# Altium PCB DigitalLabBoard_Jig.PcbDoc
Units mm, origin at the board's own origin, x right, y up, seen from the top; angles counter-clockwise.
Board outline 155 x 110 mm, 2 copper layers (Top Layer, Bottom Layer), stack 1.571 mm thick; 24 components, 0 nets, 115 pads, 0 vias.
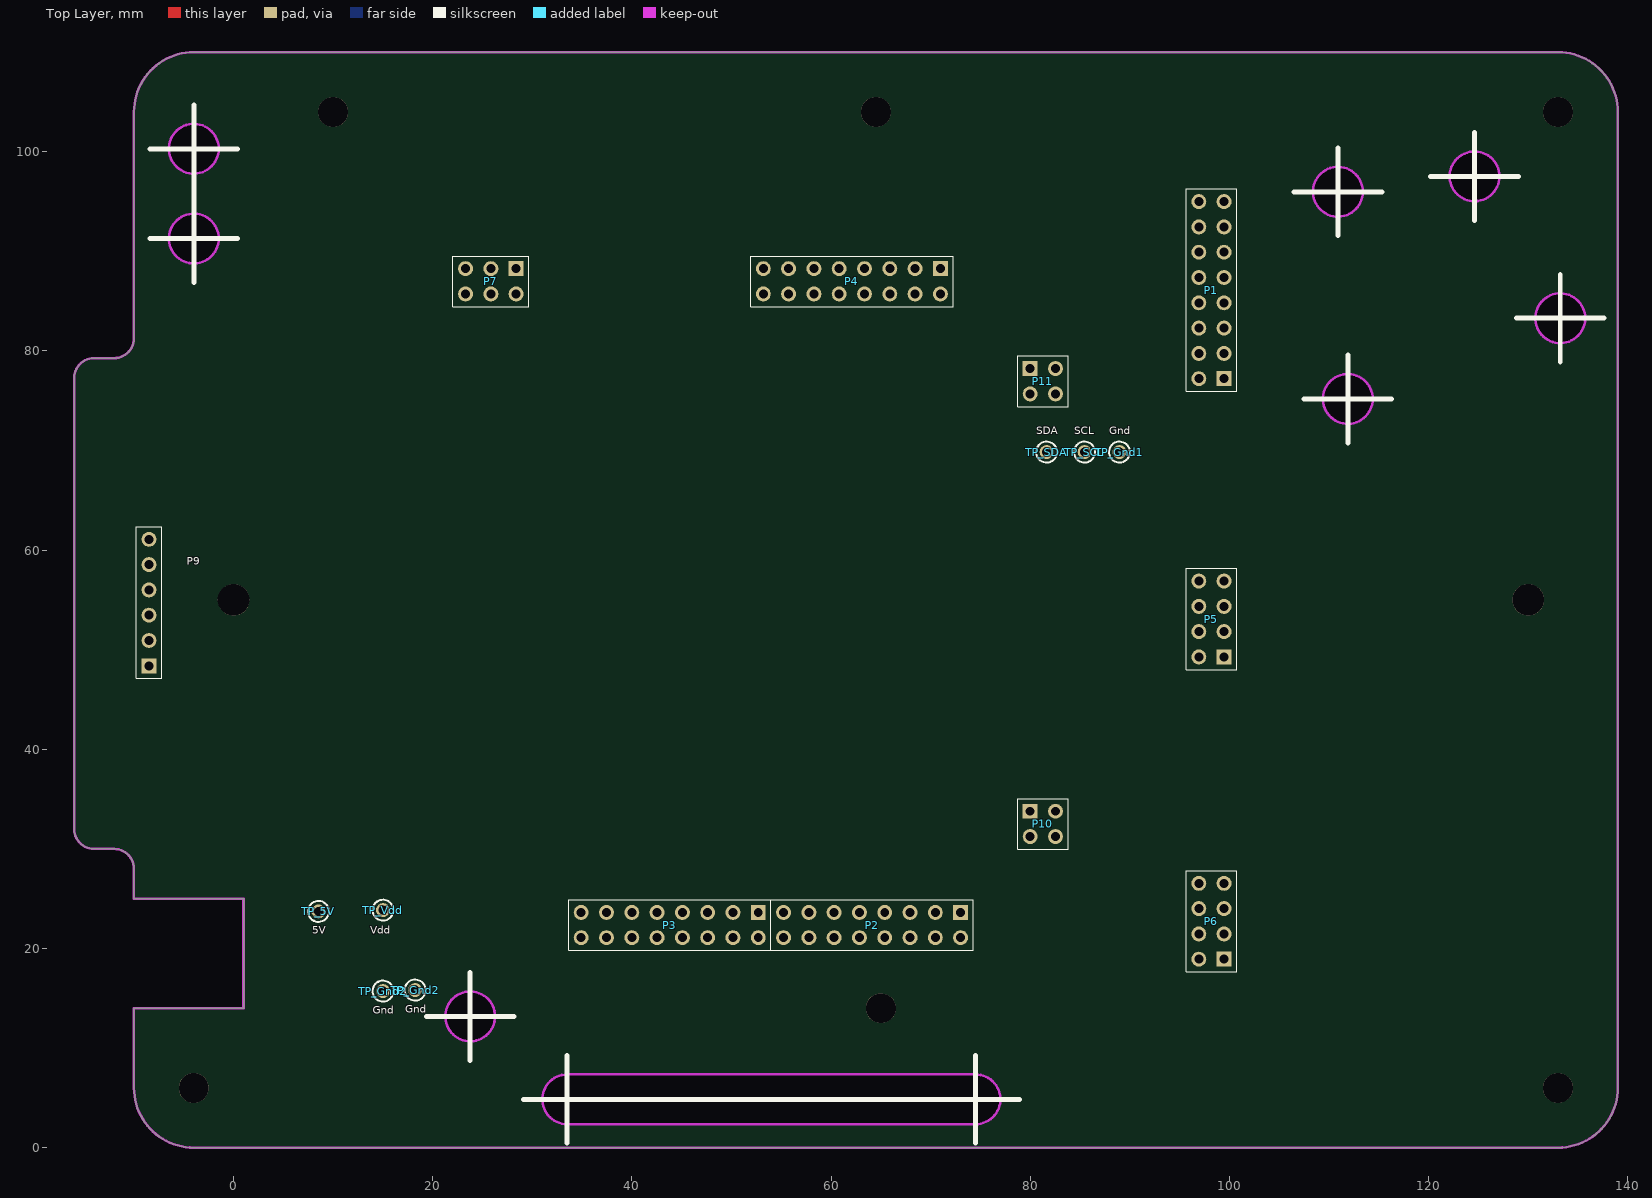
[diagram p0: Top Layer view]
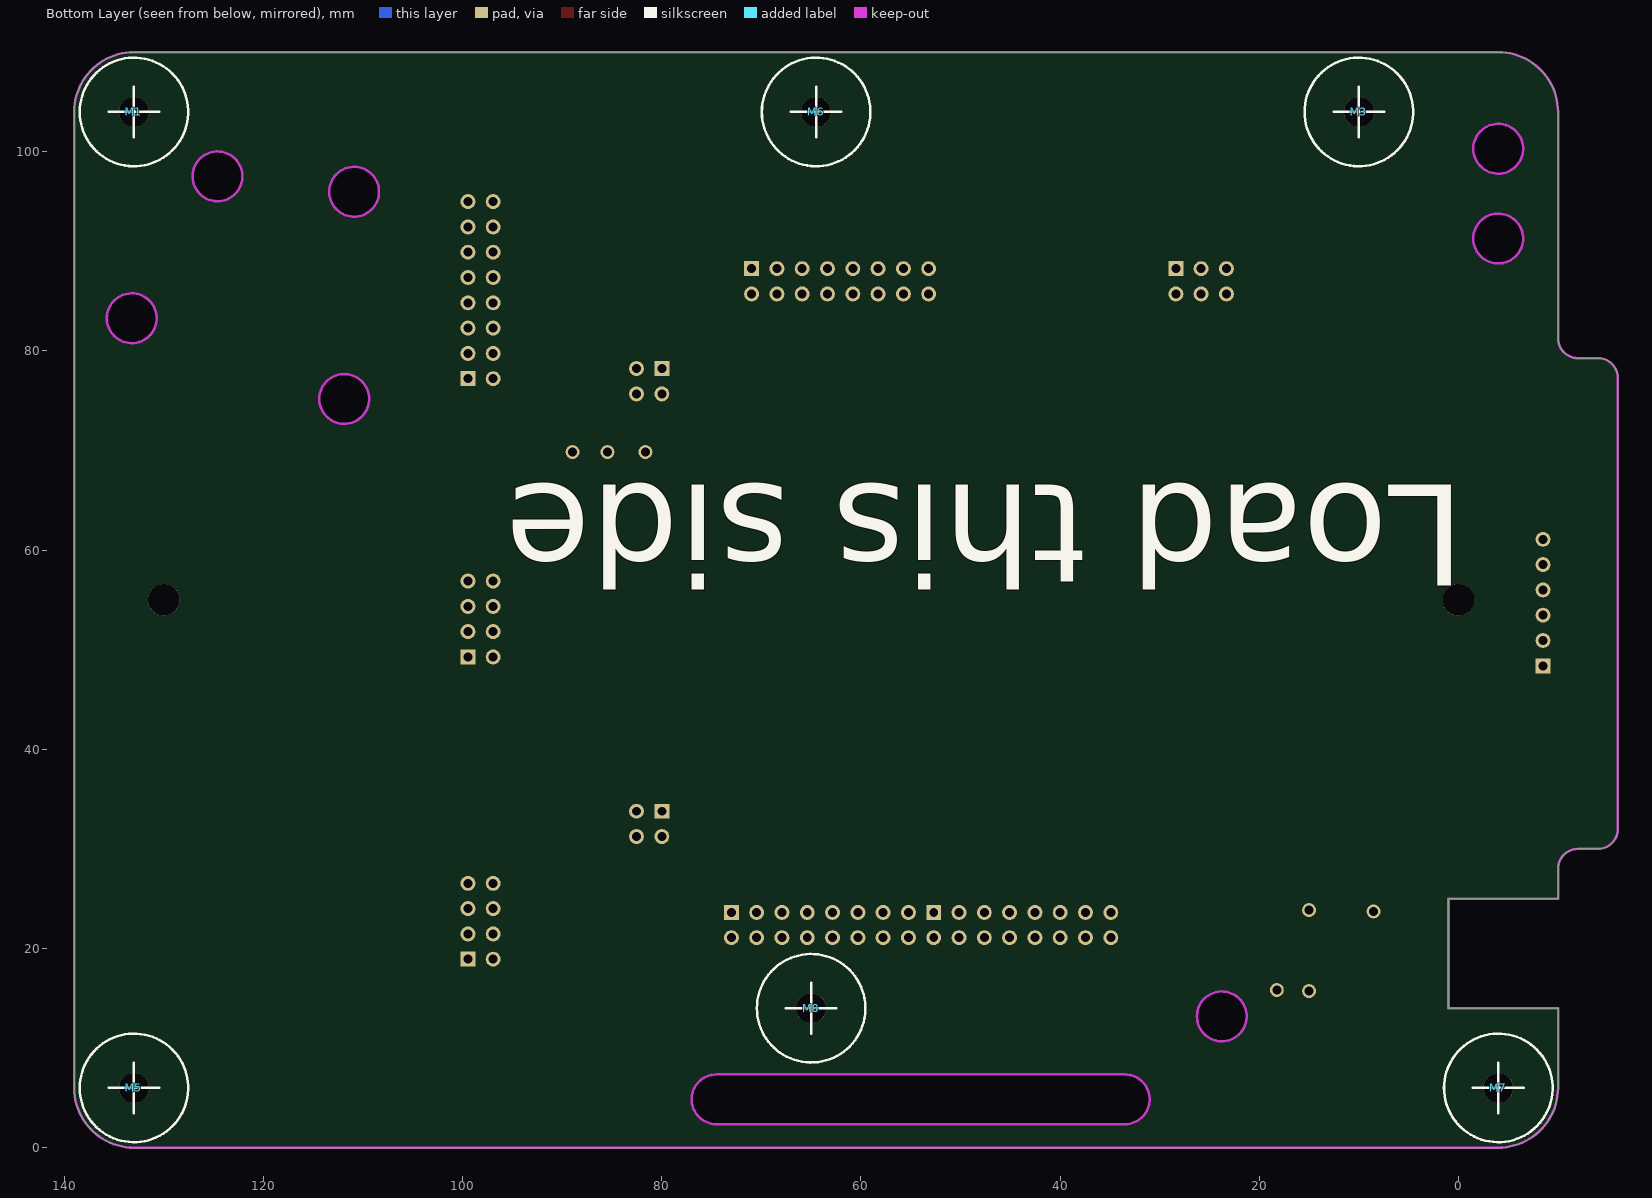
[diagram p1: Bottom Layer view, seen from below]

## Layer stack, top to bottom
Top Solder: solder mask 0.0102, Solder Resist, Dk 3.5
Top Layer: signal copper 0.0356
Dielectric 1: dielectric 1.5, FR-4, Dk 4.8
Bottom Layer: signal copper 0.0356
Bottom Solder: solder mask 0.0102, Solder Resist, Dk 3.5

## Board outline
-14,30 -12,30 cw(c-12,28) -10,28 -10,25 1,25 1,14 -10,14 -10,6 ccw(c-4,6) -4,0 133,0 ccw(c133,6) 139,6 139,104 ccw(c133,104) 133,110 -4,110 ccw(c-4,104) -10,104 -10,81.28 cw(c-12,81.28) -12,79.28 -14,79.28 ccw(c-14,77.28) -16,77.28 -16,32 ccw(c-14,32)
cut-out: 108.396,95.987 ccw(c110.896,95.987) 110.896,93.487 ccw(c110.896,95.987) 113.396,95.987 ccw(c110.896,95.987) 110.896,98.487 ccw(c110.896,95.987)
cut-out: 122.112,97.536 ccw(c124.612,97.536) 124.612,95.036 ccw(c124.612,97.536) 127.112,97.536 ccw(c124.612,97.536) 124.612,100.036 ccw(c124.612,97.536)
cut-out: 130.723,83.287 ccw(c133.223,83.287) 133.223,80.787 ccw(c133.223,83.287) 135.723,83.287 ccw(c133.223,83.287) 133.223,85.787 ccw(c133.223,83.287)
cut-out: 109.387,75.184 ccw(c111.887,75.184) 111.887,72.684 ccw(c111.887,75.184) 114.387,75.184 ccw(c111.887,75.184) 111.887,77.684 ccw(c111.887,75.184)
cut-out: 21.264,13.184 ccw(c23.764,13.184) 23.764,10.684 ccw(c23.764,13.184) 26.264,13.184 ccw(c23.764,13.184) 23.764,15.684 ccw(c23.764,13.184)
cut-out: 33.507,2.353 cw(c33.507,4.853) 33.507,7.353 74.502,7.353 cw(c74.502,4.853) 74.502,2.353
cut-out: -6.491,91.288 ccw(c-3.991,91.288) -3.991,88.788 ccw(c-3.991,91.288) -1.491,91.288 ccw(c-3.991,91.288) -3.991,93.788 ccw(c-3.991,91.288)
cut-out: -6.491,100.305 ccw(c-3.991,100.305) -3.991,97.805 ccw(c-3.991,100.305) -1.491,100.305 ccw(c-3.991,100.305) -3.991,102.805 ccw(c-3.991,100.305)

## Design rules (kind name [scope] priority, off if disabled: settings)
BoardOutlineClearance [All] p1: gap=0.381 ignorepadtopadclearanceinfootprint=FALSE
Clearance [All] p1: gap=0.127 ignorepadtopadclearanceinfootprint=FALSE
DiffPairsRouting [All] p1: maxlimit=0.127 minlimit=0.127 mostfreqgap=0.127 toplayer_minwidth=0.254 toplayer_maxwidth=0.254 toplayer_prefwidth=0.254 bottomlayer_minwidth=0.254 bottomlayer_maxwidth=0.254 bottomlayer_prefwidth=0.254 maxuncoupledlength=12.7
HoleSize [All] p1: absolutevalues=TRUE maxlimit=20 minlimit=0.25 maxpercent=80.000 minpercent=20.000
MinimumAnnularRing [All] p1: minimumring=0.089
MinimumSolderMaskSliver [All] p1 off: minsoldermaskwidth=0.254
PolygonConnect PolygonConnect_Via [IsVia] p1: connectstyle=Direct reliefconductorwidth=0.254 reliefentries=4 polygonreliefangle="90 Angle" airgapwidth=0.254
PolygonConnect [All] p2: connectstyle=Relief reliefconductorwidth=0.254 reliefentries=4 polygonreliefangle="90 Angle" airgapwidth=0.254
RoutingVias [All] p1: holewidth=0.711 width=1.27 viastyle="Through Hole" minholewidth=0.711 minwidth=1.27 maxholewidth=0.711 maxwidth=1.27
SilkToSilkClearance [All] p1 off: silktosilkclearance=0.254
SilkToSolderMaskClearance [IsPad] p1 off: minsilkscreentomaskgap=0.254 clearancetoexposedcopper=TRUE
SolderMaskExpansion [All] p1: expansion=0.102
Width [All] p1: maxlimit=0.762 minlimit=0.254 preferedwidth=0.254
25 further rules are at their usual default settings.

## Classes and differential pairs
differential pair USBD_R: +"" -""
differential pair USBD: +"" -""

## Components (designator, comment, footprint, x,y, rotation, side; value= is the part's Value field where it differs from the comment)
Logo "OSHW Logo" OSHW 185.293,55.499 r180 bottom
M1 "Plastic Bumper" "Bumper_RBS-2 + 3mm hole" 133,104 r180 bottom locked
M3 "Plastic Bumper" "Bumper_RBS-2 + 3mm hole" 10,104 r180 bottom locked
M5 "Plastic Bumper" "Bumper_RBS-2 + 3mm hole" 133,5.999 r180 bottom locked
M6 "Plastic Bumper" "Bumper_RBS-2 + 3mm hole" 64.5,104 r180 bottom locked
M7 "Plastic Bumper" "Bumper_RBS-2 + 3mm hole" -4,5.999 r180 bottom locked
M8 "Plastic Bumper" "Bumper_RBS-2 + 3mm hole" 65,13.999 r180 bottom locked (schematic designator M5)
P1 "Header 2x8" HDR2X8S 99.466,77.215 r90 top locked
P2 "Header 2x8" HDR2X8S 73.01,23.621 r180 top locked
P3 "Header 2x8" HDR2X8S 52.69,23.621 r180 top locked
P4 "Header 2x8" HDR2X8S 70.978,88.265 r180 top locked
P5 "Header 2x4" HDR2X4S 99.466,49.275 r90 top locked
P6 "Header 2x4" HDR2X4S 99.466,18.922 r90 top locked
P7 "Header 2x3" HDR2X3S 28.377,88.265 r180 top locked
P9 "Header, 6-Pin" HDR1X6S -8.492,48.386 r90 top locked
P10 "Header 2x2" HDR2X2S 79.995,33.781 r270 top locked
P11 "Header 2x2" HDR2X2S 79.995,78.231 r270 top locked
TP_5V "5V" "PCBPIN - 0.9MM" 8.526,23.723 r0 top locked
TP_Gnd1 "Gnd" "PCBPIN - 0.9MM" 88.959,69.85 r90 top locked
TP_Gnd2 "Gnd" "PCBPIN - 0.9mm" 18.237,15.824 r0 top
TP_Gnd2 "Gnd" "PCBPIN - 0.9MM" 15.003,15.722 r0 top locked
TP_SCL "SCL" "PCBPIN - 0.9MM" 85.456,69.85 r90 top locked
TP_SDA "SDA" "PCBPIN - 0.9MM" 81.646,69.85 r90 top locked
TP_Vdd "Vdd" "PCBPIN - 0.9MM" 15.003,23.85 r90 top locked

## Footprints (in the part's own frame and the unit in brackets; to place one, negate y for a bottom-side part, rotate by r counter-clockwise, add the part's x,y. Pads: shape width x height; smd on the part's side, far side on the other; paste and mask are expansions set on the pad)
"Bumper_RBS-2 + 3mm hole" [mm] "Plastic bumper/foot + 3mm hole"
  round 3 hole 3: 1(0,0)
  silkscreen extent -5.45,-5.45 5.45,5.45, body extent -5.55,-5.55 5.55,5.55, height 5.1
HDR1X6S [mm] "Header; 6 Position; Straight"
  rect 1.5x1.5 hole 0.9: 1(0,0)
  round 1.5 hole 0.9: 2(2.54,0) 3(5.08,0) 4(7.62,0) 5(10.16,0) 6(12.7,0)
  silkscreen extent -1.27,-1.27 13.97,1.27, body extent -1.27,-1.27 13.97,1.27, height 6
HDR2X2S [mm] "Header; 2x2 Position; Straight"
  rect 1.5x1.5 hole 0.9: 1(0,0)
  round 1.5 hole 0.9: 2(0,2.54) 3(2.54,0) 4(2.54,2.54)
  silkscreen extent -1.27,-1.27 3.81,3.81, body extent -1.27,-1.27 3.81,3.81, height 6
HDR2X3S [mm] "Header; 2x3 Position; Straight"
  rect 1.5x1.5 hole 0.9: 1(0,0)
  round 1.5 hole 0.9: 2(0,2.54) 3(2.54,0) 4(2.54,2.54) 5(5.08,0) 6(5.08,2.54)
  silkscreen extent -1.27,-1.27 6.35,3.81, body extent -1.27,-1.27 6.35,3.81, height 6
HDR2X4S [mm] "Connector; Header; 2x4 Position; Straight"
  rect 1.5x1.5 hole 0.9: 1(0,0)
  round 1.5 hole 0.9: 2(0,2.54) 3(2.54,0) 4(2.54,2.54) 5(5.08,0) 6(5.08,2.54) 7(7.62,0) 8(7.62,2.54)
  silkscreen extent -1.27,-1.27 8.89,3.81, body extent -1.27,-1.27 8.89,3.81, height 6
HDR2X8S [mm] "Connector; Header; 2x8 Position; Straight"
  rect 1.5x1.5 hole 0.9: 1(0,0)
  round 1.5 hole 0.9: 2(0,2.54) 3(2.54,0) 4(2.54,2.54) 5(5.08,0) 6(5.08,2.54) 7(7.62,0) 8(7.62,2.54) 9(10.16,0) 10(10.16,2.54) 11(12.7,0) 12(12.7,2.54) 13(15.24,0) 14(15.24,2.54) 15(17.78,0) 16(17.78,2.54)
  silkscreen extent -1.27,-1.27 19.05,3.81, body extent -1.27,-1.27 19.05,3.81, height 6
OSHW [mm] "OSHW Logo"
"PCBPIN - 0.9MM" [mm]
  round 1.4 hole 0.9: 1(0,0)
  silkscreen extent -1.05,-1.05 1.05,1.05, body extent -1.27,-1.27 1.27,1.27, height 6
"PCBPIN - 0.9mm" [mm]
  round 1.4 hole 0.9: 1(0,0)
  silkscreen extent -1.05,-1.05 1.05,1.05, body extent -1.27,-1.27 1.27,1.27, height 6

## Part data
M1 M3 M5 M6 M7 M8: library part Mounting_Feet, "Plastic bumper/foot", Digikey=RPC4821-ND
P9: library part "Header 1x6", Digikey=A26512-06-ND, LatestRevisionDate=17-Jul-2002, LatestRevisionNote="Re-released for DXP Platform.", Publisher="Altium Limited"
TP_5V TP_Gnd1 TP_Gnd2 TP_Gnd2 TP_SCL TP_SDA TP_Vdd: library part TP, "Test Point"
P1 P2 P3 P4: Digikey=A26528-08-ND
P5 P6: Digikey=A26528-04-ND
P10 P11: Digikey=A26528-02-ND

## Free pads (board coordinates)
  round 3.175 hole 3.175: 0(0,55) 0(130,55)

## Nets (pads, with @x,y where several pads share a name; then routed paths per layer and width w, separated by ;. In a path a pad name is that pad's centre, name@x,y a point inside that pad or via, vN(x,y) a via of type N, cw(c..) or ccw(c..) an arc to the next point about the centre after c; other vN are vias at no path point)
pads on no net: M1.1 M3.1 M5.1 M6.1 M7.1 M8.1 P1.1 P1.2 P1.3 P1.4 P1.5 P1.6 P1.7 P1.8 P1.9 P1.10 P1.11 P1.12 P1.13 P1.14 P1.15 P1.16 P2.1 P2.2 P2.3 P2.4 P2.5 P2.6 P2.7 P2.8 P2.9 P2.10 P2.11 P2.12 P2.13 P2.14 P2.15 P2.16 P3.1 P3.2 P3.3 P3.4 P3.5 P3.6 P3.7 P3.8 P3.9 P3.10 P3.11 P3.12 P3.13 P3.14 P3.15 P3.16 P4.1 P4.2 P4.3 P4.4 P4.5 P4.6 P4.7 P4.8 P4.9 P4.10 P4.11 P4.12 P4.13 P4.14 P4.15 P4.16 P5.1 P5.2 P5.3 P5.4 P5.5 P5.6 P5.7 P5.8 P6.1 P6.2 P6.3 P6.4 P6.5 P6.6 P6.7 P6.8 P7.1 P7.2 P7.3 P7.4 P7.5 P7.6 P9.1 P9.2 P9.3 P9.4 P9.5 P9.6 P10.1 P10.2 P10.3 P10.4 P11.1 P11.2 P11.3 P11.4 TP_5V.1 TP_Gnd1.1 TP_Gnd2.1 TP_SCL.1 TP_SDA.1 TP_Vdd.1

## Polygon pours and split planes (outlines as drawn)
no net on Multi-Layer (solid): -24.115,63.166
no net on Top Overlay (solid, pour order 2): 95.946,69.81

## Keep-outs
Keep-Out Layer:
  circle w0.254: c133.223,83.287 r2.5
  circle w0.254: c111.887,75.184 r2.5
  circle w0.254: c110.896,95.987 r2.5
  circle w0.254: c124.612,97.536 r2.5
  circle w0.254: c23.764,13.184 r2.5
  circle w0.254: c-3.991,91.288 r2.5
  circle w0.254: c-3.991,100.305 r2.5
  lines w0.254: -10,25 -10,25 ; -10,25 -10,28 ccw(c-12,28) -12,30 -14,30 cw(c-14,32) -16,32 -16,77.28 cw(c-14,77.28) -14,79.28 -12,79.28 ccw(c-12,81.28) -10,81.28 -10,104 cw(c-4,104) -4,110 133,110 cw(c133,104) 139,104 139,6 cw(c133,6) 133,0 -4,0 cw(c-4,6) -10,6 -10,14 1,14 1,25 -10,25 ; 33.507,2.353 cw(c33.507,4.853) 33.507,7.353 74.502,7.353 cw(c74.502,4.853) 74.502,2.353 33.507,2.353

## Silkscreen, mask and mechanical layers (free items; w line width, h text height)
Top Overlay:
  lines w0.5: -8.403,91.288 -3.991,91.288 ; -8.403,100.305 -3.991,100.305 ; -3.991,86.876 -3.991,91.288 ; -3.991,95.699 -3.991,91.288 ; -3.991,95.893 -3.991,100.305 ; -3.991,104.716 -3.991,100.305 ; 0.421,91.288 -3.991,91.288 ; 0.421,100.305 -3.991,100.305 ; 19.352,13.184 23.764,13.184 ; 23.764,8.772 23.764,13.184 ; 23.764,17.595 23.764,13.184 ; 28.176,13.184 23.764,13.184 ; 29.095,4.853 33.507,4.853 ; 33.507,0.442 33.507,4.853 ; 33.507,9.265 33.507,4.853 ; 74.502,0.442 74.502,4.853 ; 74.502,9.265 74.502,4.853 ; 74.73,4.853 33.507,4.853 ; 78.914,4.853 74.502,4.853 ; 106.485,95.987 110.896,95.987 ; 107.475,75.184 111.887,75.184 ; 110.896,91.575 110.896,95.987 ; 110.896,100.398 110.896,95.987 ; 111.887,70.772 111.887,75.184 ; 111.887,79.596 111.887,75.184 ; 115.308,95.987 110.896,95.987 ; 116.299,75.184 111.887,75.184 ; 120.201,97.536 124.612,97.536 ; 124.612,93.124 124.612,97.536 ; 124.612,101.948 124.612,97.536 ; 128.811,83.287 133.223,83.287 ; 129.024,97.536 124.612,97.536 ; 133.223,78.875 133.223,83.287 ; 133.223,87.698 133.223,83.287 ; 137.635,83.287 133.223,83.287
Bottom Overlay:
  text "Load this side" at -0.61,66.548 h10.16 r180
Mechanical 1:
  lines w0.254: 29.602,4.952 31.202,4.952

## Dimensions
-14,30 to -4,0 on Mechanical 1
-16,110 to -12,79.28 on Mechanical 1
-10,28 to -16,32 on Mechanical 1
-16,77.28 to 139,104 on Mechanical 1
-4,110 to -4,0 on Mechanical 1